# EAGLE board design_v2 (EAGLE 9.5.2)
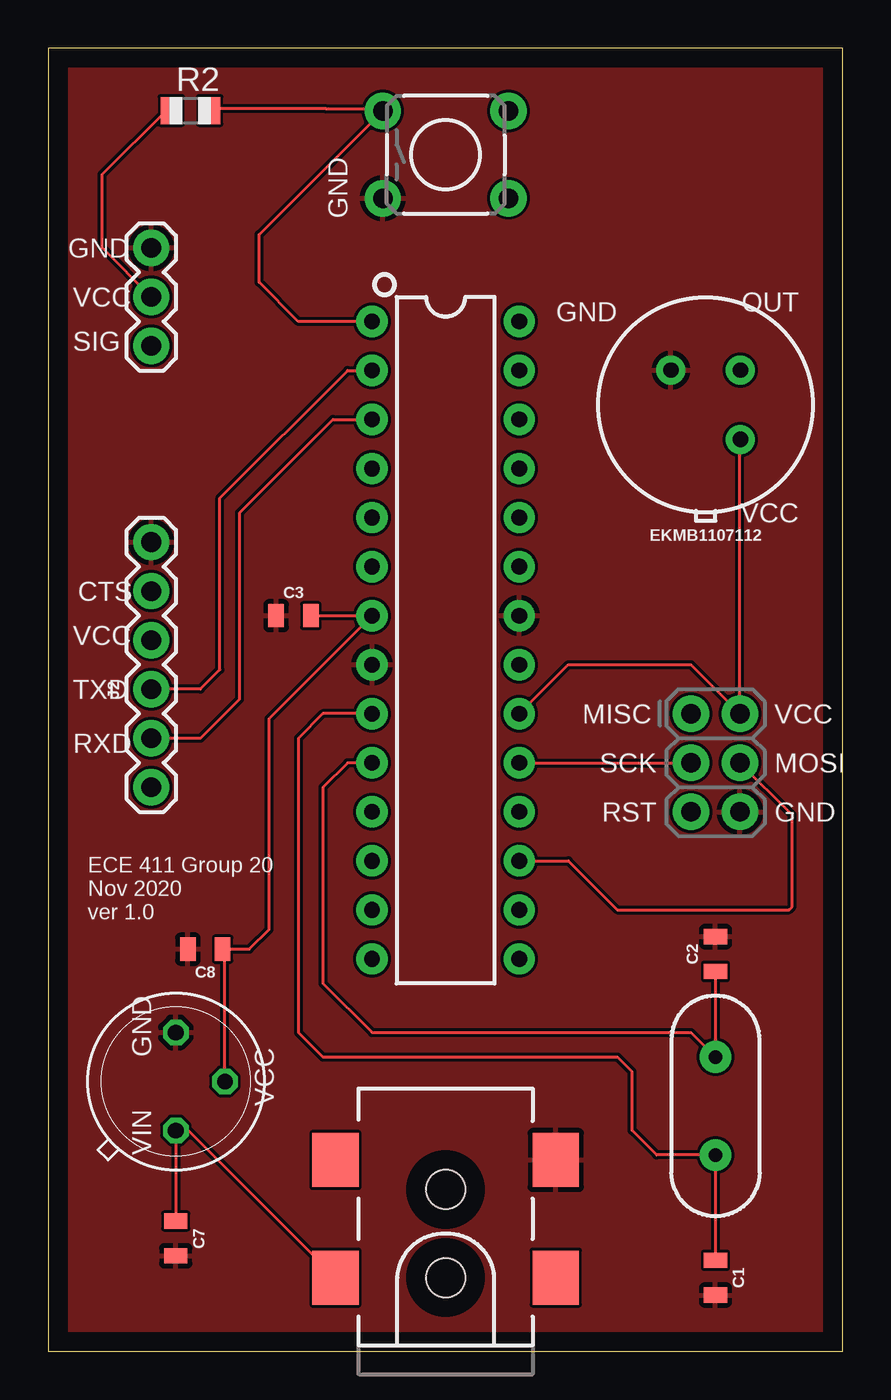
[diagram p0: board, top side]
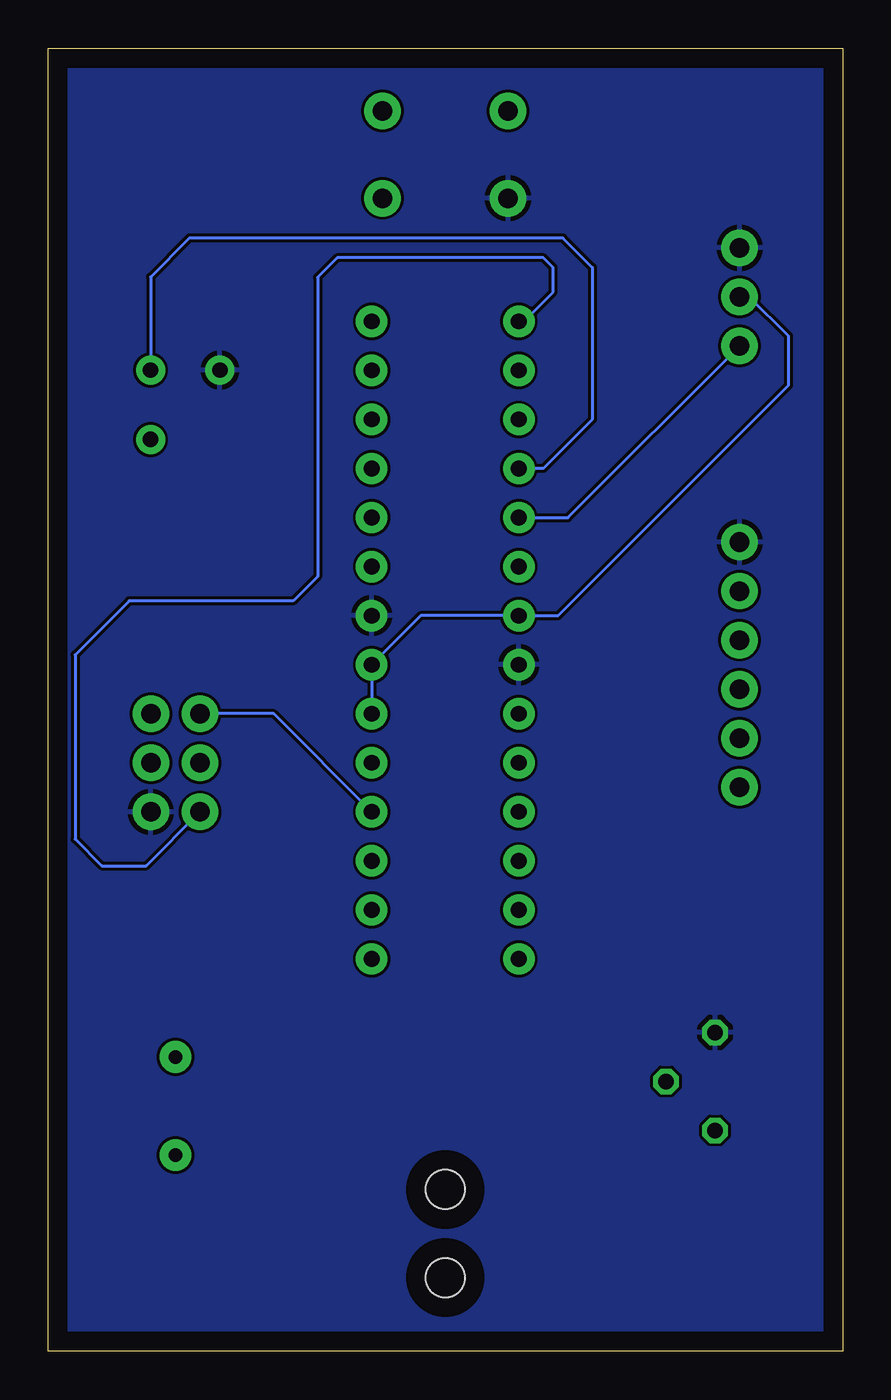
[diagram p1: board, bottom side, seen from below]

Size 41.13 x 67.49 mm. Coordinates in mm from the lower left corner, seen from the top.
Outline: 0,0 41.13,0 41.13,67.49 0,67.49 0,0
Copper layers (1*16): Top 0.035mm / dielectric 1.5mm / Bottom 0.035mm
Design rules "default": minimum track width 6mil, minimum drill 0.35mm, track to track 6mil, track to pad 6mil, pad to pad 6mil, via to via 6mil, smd to smd 6mil, copper to edge 40mil, drill to drill 6mil, minimum pad ring 10mil, minimum via ring 8mil, stop-mask expansion 4mil, vias tented up to drill 0mil, thermal gap 10mil

## Footprints (pad centres in the part's own frame; a part is rotated, then mirrored left to right if it is on the bottom)
0805 = smd 0.8 x 1.2: 1 -0.9,0; 2 0.9,0
TO39 = drill 0.813 octagon: 1 0,-2.54; 2 2.54,0; 3 0,2.54
2X3-NS = drill 1.016 pad 1.88: 1 -2.54,-1.27; 2 -2.54,1.27; 3 0,-1.27; 4 0,1.27; 5 2.54,-1.27; 6 2.54,1.27
FTDI_BASIC = drill 1.016 pad 1.88: CTS 10.16,0; DTR 0,0; GND 12.7,0; RXI 2.54,0; TXO 5.08,0; VCC 7.62,0
POWER_JACK_SMD = smd 2.8 x 2.4: GND 0,-5.7; P$4 6.1,-5.7; VIN0 0,5.7; VIN1 6.1,5.7 | hole 2.032: 0,0; 4.572,0
1X03 = drill 1.016 pad 1.88: 1 0,0; 2 2.54,0; 3 5.08,0
R0805 = smd 1.1 x 1.4: 1 -1,0; 2 1,0
TACTILE_SWITCH_PTH_6.0MM = drill 1.016 pad 1.88: 1 -3.251,2.261; 2 3.251,2.261; 3 -3.251,-2.261; 4 3.251,-2.261
DIP28 = drill 0.813 pad 1.626: 1 -16.51,-3.81; 2 -13.97,-3.81; 3 -11.43,-3.81; 4 -8.89,-3.81; 5 -6.35,-3.81; 6 -3.81,-3.81; 7 -1.27,-3.81; 8 1.27,-3.81; 9 3.81,-3.81; 10 6.35,-3.81; 11 8.89,-3.81; 12 11.43,-3.81; 13 13.97,-3.81; 14 16.51,-3.81; 15 16.51,3.81; 16 13.97,3.81; 17 11.43,3.81; 18 8.89,3.81; 19 6.35,3.81; 20 3.81,3.81; 21 1.27,3.81; 22 -1.27,3.81; 23 -3.81,3.81; 24 -6.35,3.81; 25 -8.89,3.81; 26 -11.43,3.81; 27 -13.97,3.81; 28 -16.51,3.81
TO-3 = drill 0.8 pad 1.5: GND -1.796,1.796; OUT 1.796,1.796; VDD 1.796,-1.796
HC49US = drill 0.7 pad 1.651: 1 -2.54,0; 2 2.54,0

## Placement (x,y rotation side)
C1  22pF  [0805]  34.54,3.81 270 top
C2  22pF  [0805]  34.54,20.57 90 top
C3  100nF  [0805]  12.7,38.1 0 top
C7  10uF  [0805]  6.6,5.84 270 top
C8  10uF  [0805]  8.13,20.83 180 top
IC1  7805H  [TO39]  6.6,13.97 0 top
J1  AVR_SPI_PROG_3X2NS  [2X3-NS]  34.54,30.48 270 top
J2  6_PIN_SERIAL_CABLEPTH  [FTDI_BASIC]  5.33,29.21 90 top
J4  5.5x2.1mm Barrel  [POWER_JACK_SMD]  20.57,3.81 90 top
M1  SERVO  [1X03]  5.33,52.07 90 top
R2  10K  [R0805]  7.37,64.26 0 top
S1  MOMENTARY-SWITCH-SPST-PTH-6.0MM  [TACTILE_SWITCH_PTH_6.0MM]  20.57,61.98 0 top
U1  328P  [DIP28]  20.57,36.83 270 top
U4  EKMB1107112  [TO-3]  34.04,49.02 0 top
Y1  16MHz  [HC49US]  34.54,12.7 270 top

## Library data of the parts
C1-C3 C7 C8 = SparkFun-Capacitors
IC1 R2 = adafruit
J1 J2 = SparkFun-Connectors
J4 = SparkFun-Connectors; PROD_ID: CONN-08106; SF_ID: PRT-12748
M1 = SparkFun-Electromechanical
S1 = SparkFun-Switches; PROD_ID: SWCH-08441; SF_SKU: COM-00097
U1 = SparkFun-IC-Microcontroller; PROD_ID: IC-09136
U4 = SparkFun-Sensors; PROD_ID: IC-15370
Y1 = SparkFun-Clocks; PROD_ID: XTAL-08181; SF_ID: COM-00536

## Nets
GND: C1.2 C2.2 C3.1 C7.2 C8.2 IC1.3 J1.6 J2.GND J4.P$4 M1.3 S1.3 U1.8 U1.22 U4.GND
N$1: J1.5 R2.2 S1.1 U1.1
N$2: J2.TXO U1.2
N$3: J2.RXI U1.3
N$4: C1.1 U1.9 Y1.2
N$5: C2.1 U1.10 Y1.1
N$6: C7.1 IC1.1 J4.VIN0
N$7: U1.4 U4.OUT
N$8: M1.1 U1.5
N$13: J1.3 U1.19
N$15: J1.1 U1.18
N$16: J1.4 U1.17
VCC: C3.2 C8.1 IC1.2 J1.2 M1.2 R2.1 U1.7 U1.20 U1.21 U4.VDD

## Tracks (layer width: path | path; a pad name or v marks a point on that pad's centre or on a via)
GND
  pour Bottom: 0,67.31 0,0 41.15,0 41.15,67.31
  pour Top: 0,67.31 0,0 41.15,0 41.15,67.31
N$1
  Top 0.152: U1.1 12.95,53.34 10.92,55.37 10.92,57.84 S1.1 17.44,64.35 17.02,64.35 14.39,64.35 8.45,64.35 R2.2
  Bottom 0.152: J1.5 36.07,25.15 38.35,25.15 39.73,26.53 39.73,36.07 36.94,38.86 28.45,38.86 27.18,40.13 27.18,55.63 26.16,56.64 15.49,56.64 14.99,56.13 14.99,54.86 16.51,53.34 U1.1
N$2
  Top 0.152: U1.2 15.49,50.8 8.89,44.2 8.89,35.31 7.87,34.29 J2.TXO
N$3
  Top 0.152: U1.3 14.73,48.26 9.91,43.43 9.91,33.78 7.87,31.75 J2.RXI
N$4
  Top 0.152: U1.9 14.22,33.02 12.95,31.75 12.95,16.51 14.22,15.24 29.46,15.24 30.23,14.48 30.23,11.43 31.5,10.16 Y1.2 C1.1
N$5
  Top 0.152: U1.10 15.49,30.48 14.22,29.21 14.22,19.05 16.76,16.51 33.27,16.51 Y1.1 C2.1
N$6
  Top 0.152: J4.VIN0 7.25,11.43 IC1.1 C7.1
N$7
  Bottom 0.152: U4.OUT 35.83,55.64 33.82,57.66 14.48,57.66 12.95,56.13 12.95,48.26 15.49,45.72 U1.4
N$8
  Bottom 0.152: U1.5 14.22,43.18 M1.1
N$13
  Top 0.152: U1.19 J1.3
N$15
  Bottom 0.152: U1.18 29.46,33.02 J1.1
N$16
  Top 0.152: U1.17 26.92,25.4 29.46,22.86 38.35,22.86 38.51,23.02 38.51,27.78 J1.4
VCC
  Top 0.152: U1.20 26.92,35.56 33.27,35.56 J1.2 35.81,47.21 U4.VDD | M1.2 2.79,57.15 2.79,60.96 6.1,64.26 R2.1 | IC1.2 9.14,20.71 C8.1 10.41,20.83 11.43,21.84 11.43,32.77 U1.7 C3.2
  Bottom 0.152: M1.2 4.83,54.61 2.79,52.58 2.79,50.04 14.73,38.1 U1.7 21.84,38.1 U1.21 U1.20

## Text on the board
tPlace: GND | GND | VCC | GND | OUT | SIG | VCC | CTS | VCC | TXD | MISC | VCC | RXD | SCK | MOSI | RST | GND | ECE 411 Group 20 / Nov 2020 / ver 1.0 | GND | VCC | VIN